# Altium PCB BSPD.PcbDoc
Units mil, origin at the board's own origin, x right, y up, seen from the top; angles counter-clockwise.
Board outline 6000 x 4000 mil, 2 copper layers (Top Layer, Bottom Layer); 4 components, 27 nets, 32 pads, 0 vias.
Unrouted connection lines stored in the file: 5.
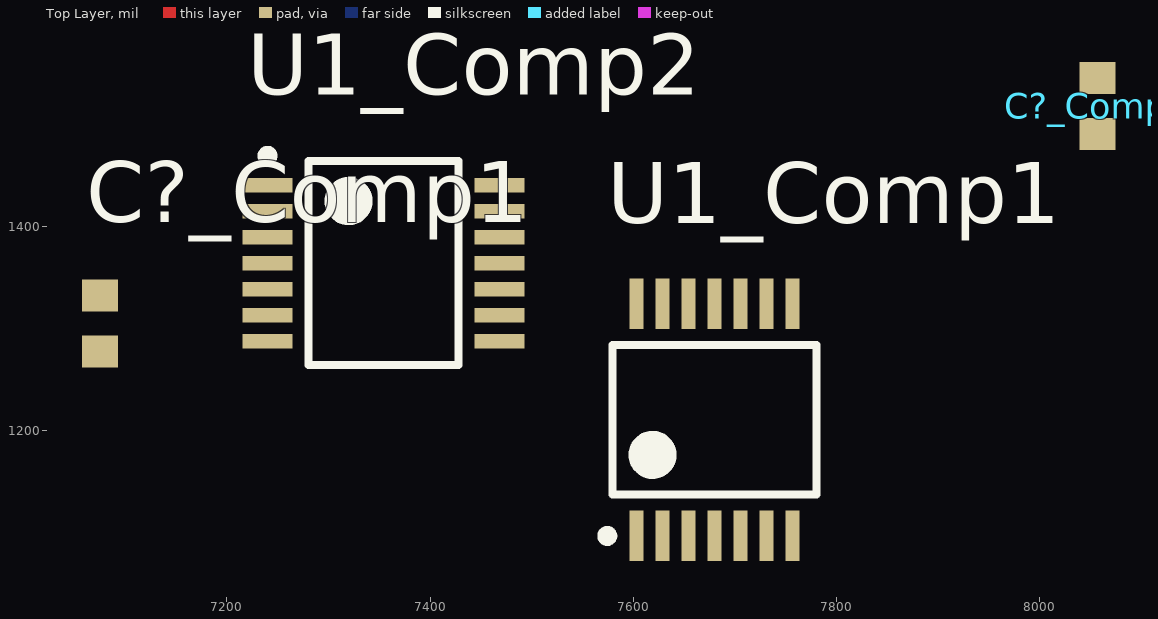
[diagram p0: Top Layer view]
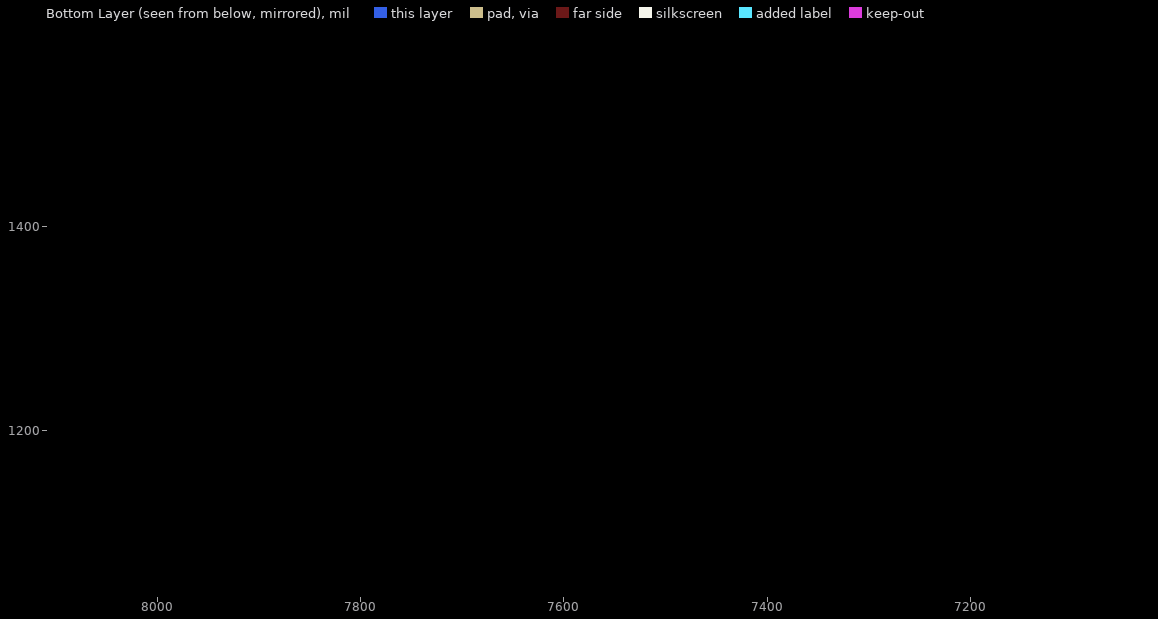
[diagram p1: Bottom Layer view, seen from below]

## Layer stack, top to bottom
Top Solder: solder mask 0.4, Solder Resist, Dk 3.5
Top Layer: signal copper 1.4
Dielectric 1: dielectric 12.6, FR-4, Dk 4.8
Bottom Layer: signal copper 1.4
Bottom Solder: solder mask 0.4, Solder Resist, Dk 3.5

## Board outline
1000,1000 7000,1000 7000,5000 1000,5000

## Design rules (kind name [scope] priority, off if disabled: settings)
Clearance [All] p1: gap=10 ignorepadtopadclearanceinfootprint=FALSE except(0: Arc-Hole Track-Hole SMDPad-Hole THPad-Hole Via-Hole Fill-Hole Poly-Hole Region-Hole Text-Hole)
PolygonConnect [All] p1: connectstyle=Relief reliefconductorwidth=10 reliefentries=4 polygonreliefangle="90 Angle" airgapwidth=10
RoomDefinition Comp1 [InComponentClass('Comp1')] p1: confinementstyle=ConfineIn formatcopy=TRUE lockcomponents=FALSE outline 7045,1060 8020,1060 8020,1480 7045,1480
RoomDefinition Comp2 [InComponentClass('Comp2')] p2: confinementstyle=ConfineIn formatcopy=TRUE lockcomponents=FALSE outline 6966.77,1274.17 9581.77,1274.17 9581.77,1694.17 6966.77,1694.17
RoutingVias [All] p1: holewidth=28 width=50 viastyle="Through Hole" minholewidth=28 minwidth=50 maxholewidth=28 maxwidth=50
SolderMaskExpansion [All] p1: expansion=4
Width [All] p1: maxlimit=10 minlimit=10 preferedwidth=10
30 further rules are at their usual default settings.

## Classes and differential pairs
channel class "Quad Comparator": Comp1 Comp2
component class Comp1: C?_Comp1 U1_Comp1
component class Comp2: C?_Comp2 U1_Comp2

## Components (designator, comment, footprint, x,y, rotation, side; value= is the part's Value field where it differs from the comment)
C?_Comp1 "Cap" 1608[0603] 7075,1305 r90 top value=0.1uF (schematic designator C?)
C?_Comp2 "Cap" 1608[0603] 8056.77,1519.17 r90 top value=0.1uF (schematic designator C?)
U1_Comp1 "LM2901VDTBR2G" ONSC-TSSOP-14-948G-01_V 7680,1210 r90 top (schematic designator U1)
U1_Comp2 "LM2901VDTBR2G" ONSC-TSSOP-14-948G-01_V 7354.17,1364.41 r0 top (schematic designator U1)

## Footprints (in the part's own frame and the unit in brackets; to place one, negate y for a bottom-side part, rotate by r counter-clockwise, add the part's x,y. Pads: shape width x height; smd on the part's side, far side on the other; paste and mask are expansions set on the pad)
1608[0603] [mm] "Chip Capacitor, Body 1.6x0.8mm, IPC High Density"
  rect 0.8x0.9 smd: 1(-0.7,0) 2(0.7,0)
  body extent -0.87,-0.48 0.87,0.48, height 1.3
ONSC-TSSOP-14-948G-01_V [mm] "SOP, 14-Leads, Body 5.1x4.5mm, Pitch 0.65mm"
  rect 1.26x0.36 smd: 1(-2.9,1.95) 2(-2.9,1.3) 3(-2.9,0.65) 4(-2.9,0) 5(-2.9,-0.65) 6(-2.9,-1.3) 7(-2.9,-1.95) 8(2.9,-1.95) 9(2.9,-1.3) 10(2.9,-0.65) 11(2.9,0) 12(2.9,0.65) 13(2.9,1.3) 14(2.9,1.95)
  silkscreen extent -3.02,-2.55 1.87,2.8, body extent -2.25,-2.55 2.25,2.55, height 1.2

## Part data
C?_Comp1 C?_Comp2: "Capacitor", LatestRevisionDate=17-Jul-2002, LatestRevisionNote="Re-released for DXP Platform.", PackageDescription="Radial Cap, Thru-Hole; 2 Leads; 0.3 in Pin Spacing", PackageReference=RAD-0.3, Published=8-Jun-2000, Publisher="Altium Limited"
U1_Comp1 U1_Comp2: library part CMP-1305-00071-1, "Single Supply Quad Comparators, -40 to 125 degC, 14-Pin TSSOP, Pb-Free, Tape and Reel", Manufacturer="On Semiconductor", ComponentLink1Description="Manufacturer URL", ComponentLink1URL=http://www.onsemi.com/, ComponentLink2Description=Datasheet, ComponentLink2URL=http://www.onsemi.com/pub_link/Collateral/LM339-D.PDF, ComponentLink3Description="Package Specification", ComponentLink3URL=http://www.onsemi.com/pub_link/Collateral/948G-01.PDF, DatasheetVersion="Rev. 20", IO Typ (mA)=16, Mounting Technology="Surface Mount", PackageDescription="14-Pin Small Outline Package, Body 5 x 4.4 mm, Pitch 0.65 mm", PackageReference=TSSOP-14-948G-01, PackageVersion="Rev. B, 10/2006", Packing="Tape and Reel", PartId=1, PartNumber=LM2901VDTBR2G, RoHS=TRUE

## Nets (pads, with @x,y where several pads share a name; then routed paths per layer and width w, separated by ;. In a path a pad name is that pad's centre, name@x,y a point inside that pad or via, vN(x,y) a via of type N, cw(c..) or ccw(c..) an arc to the next point about the centre after c; other vN are vias at no path point)
+12: C?_Comp1.2 C?_Comp2.2
GND: C?_Comp1.1 C?_Comp2.1 U1_Comp1.12 U1_Comp2.12
NetU1_Comp1_1: U1_Comp1.1
NetU1_Comp1_2: U1_Comp1.2
NetU1_Comp1_4: U1_Comp1.4
NetU1_Comp1_5: U1_Comp1.5
NetU1_Comp1_6: U1_Comp1.6
NetU1_Comp1_7: U1_Comp1.7
NetU1_Comp1_8: U1_Comp1.8
NetU1_Comp1_9: U1_Comp1.9
NetU1_Comp1_10: U1_Comp1.10
NetU1_Comp1_11: U1_Comp1.11
NetU1_Comp1_13: U1_Comp1.13
NetU1_Comp1_14: U1_Comp1.14
NetU1_Comp2_1: U1_Comp2.1
NetU1_Comp2_2: U1_Comp2.2
NetU1_Comp2_4: U1_Comp2.4
NetU1_Comp2_5: U1_Comp2.5
NetU1_Comp2_6: U1_Comp2.6
NetU1_Comp2_7: U1_Comp2.7
NetU1_Comp2_8: U1_Comp2.8
NetU1_Comp2_9: U1_Comp2.9
NetU1_Comp2_10: U1_Comp2.10
NetU1_Comp2_11: U1_Comp2.11
NetU1_Comp2_13: U1_Comp2.13
NetU1_Comp2_14: U1_Comp2.14
VCC: U1_Comp1.3 U1_Comp2.3